# Altium PCB ch32-mainboard-v4.PcbDoc (part 2 of 2)
Units mil, origin at the board's own origin, x right, y up, seen from the top; angles counter-clockwise.
Board outline 5137.01 x 3091.1 mil, 2 copper layers (Top Layer, Bottom Layer); 87 components, 107 nets, 428 pads, 247 vias.
Unrouted connection lines stored in the file: 108.
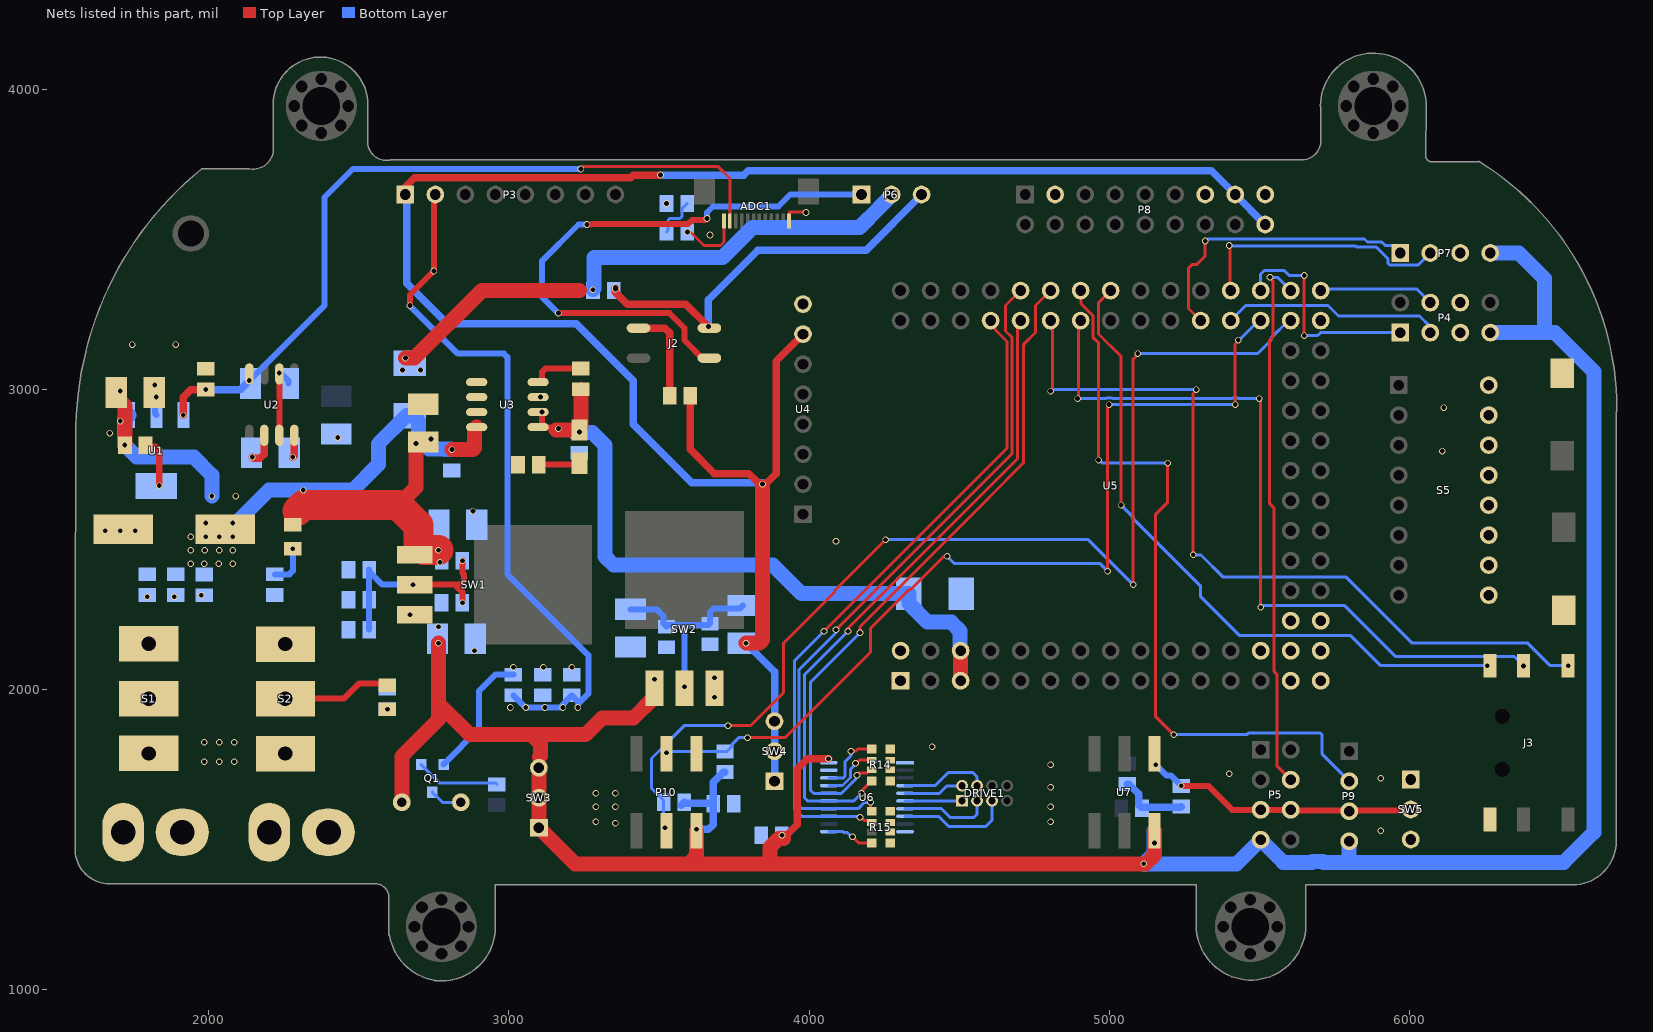
[diagram p2: the nets of this part, all layers, seen from the top]

## Via types
v1: diameter 22, hole 16, Top Layer to Bottom Layer, 247 vias

## Nets (pads, with @x,y where several pads share a name; then routed paths per layer and width w, separated by ;. In a path a pad name is that pad's centre, name@x,y a point inside that pad or via, vN(x,y) a via of type N, cw(c..) or ccw(c..) an arc to the next point about the centre after c; other vN are vias at no path point) (continued)
D8: J3.4 U5.65 | length 2237
  Top Layer w10: U5.65@5005,3330 4964.47,3289.47 4964.47,3185.53 5040,3110 v1(5040,2615) ; v1(6260,2080) 6268.15,2080 J3.4@6268.66,2079.49
  Bottom Layer w10: v1(5040,2615) 5080,2575 5080,2570 5305,2345 5305,2310 5435,2180 5805,2180 5905,2080 v1(6260,2080)
D9: J3.5 U5.68 | length 2530.5
  Top Layer w10: v1(4895,2970) 4897.3,2972.3 4897.3,3222.3 U5.68@4905,3230 ; v1(5500,2970) 5500,2966.75 5505,2961.75 v1(5505,2275)
  Bottom Layer w10: v1(4895,2970) 4988.89,2970 4990.89,2972 5009.11,2972 5011.11,2970 5408.89,2970 5410.89,2972 5429.11,2972 5431.11,2970 v1(5500,2970) ; v1(5505,2275) 5510,2280 5785,2280 5955,2110 6350.35,2110 v1(6380.87,2079.49)
D10: P9.2 U5.67 | length 2461.3
  Top Layer w10: U5.67@4905,3330 4906.84,3328.16 4906.84,3285.47 4945.53,3246.79 4945.53,3174.47 4965,3155 v1(4965,2765) ; v1(5195,2755) 5195,2625 5155,2585 5155,1910 v1(5215,1850)
  Bottom Layer w10: v1(4965,2765) 4968.25,2765 4978.25,2755 v1(5195,2755) ; v1(5215,1850) 5458.69,1850 5463.69,1855 5704.14,1855 5710,1849.14 5710,1785 P9.2@5800,1695
D11: J3.6 U5.70 | length 2687
  Top Layer w10: v1(4805,2995) 4805,2998.25 4812,3005.25 4812,3223 U5.70@4805,3230 ; v1(5280,2450) 5280,2986.75 5290,2996.75 v1(5290,3000)
  Top Layer w20: J3.6@6528.5,2079.49 6529.49,2079.49 v1(6530,2080)
  Bottom Layer w10: v1(4805,2995) 4808.25,2995 4813.25,3000 v1(5290,3000) ; v1(5280,2450) 5281,2449 5306,2449 5380,2375 5790,2375 6010,2155 6395,2155 6470,2080 v1(6530,2080)
D12: R14.3 U5.69 U6.16 | length 2244.4
  Top Layer w10: v1(4160,1715) 4166.87,1721.87 4191.87,1721.87 4197.09,1727.09 4198.62,1727.09 4205,1733.46 4205,1735 4206.5,1733.5 R14.3@4209.37,1733.5 ; v1(4170,2190) 4170,2210 4603,2643 4603,2644.11 4714,2755.11 4714,3149 4755,3190 4755,3280 U5.69@4805,3330
  Bottom Layer w10: v1(4160,1715) 4160,1706.78 4108.22,1655 U6.16@4065.91,1655 4015,1655 4005,1665 4005,2025 v1(4170,2190)
D13: R14.4 U5.72 U6.15 | length 2155.9
  Top Layer w10: v1(4130,2195) 4130,2205 4695,2770 4695,3220 U5.72@4705,3230 ; v1(4175,1655) 4177.3,1657.3 4177.3,1665.01 4207.28,1695 R14.4@4210.47,1695 ; R14.4@4209.37,1696.1 R14.4@4210.47,1695 ; R14.4@4215,1695 R14.4@4210.47,1695
  Bottom Layer w10: v1(4130,2195) 3985,2050 3985,1640 3995.59,1629.41 U6.15@4065.91,1629.41 4149.41,1629.41 v1(4175,1655)
D14: R15.1 U5.71 U6.14 | length 2322.5
  Top Layer w10: v1(4090,2200) 4676,2786 4676,3174 4655,3195 4655,3280 U5.71@4705,3330 ; v1(4205,1625) 4205,1599.37 R15.1@4209.37,1595
  Bottom Layer w10: v1(4090,2200) 4090,2190 3967,2067 3967,1613 3976.18,1603.82 U6.14@4065.91,1603.82 4163.82,1603.82 4185,1625 v1(4205,1625)
D15: R15.2 U5.74 U6.13 | length 2220
  Top Layer w10: v1(4050,2195) 4660,2805 4660,3160 4620,3200 4620,3211.82 4605,3226.82 U5.74@4605,3230 ; v1(4170,1575) 4173.25,1575 4184.23,1564.02 4202.95,1564.02 R15.2@4209.37,1557.6
  Bottom Layer w10: v1(4050,2195) 3951,2096 3951,1604 3976.77,1578.23 U6.13@4065.91,1578.23 4163.52,1578.23 4166.75,1575 v1(4170,1575)
DGND: C20.1 C21.1 C22.1 D4.1 J3.1 L7.2 P3.2 P4.5 P4.6 P5.5 P5.6 P7.3 P8.2 P8.7 P8.16 P9.3 P10.1 R1.2 R2.2 R3.2 R14.5 R14.6 R14.7 R14.8 R15.5 R15.6 R15.7 R15.8 S3.1 S4.1 S5.9 S5.10 S5.11 S5.12 S5.13 S5.14 S5.15 S5.16 SW5.1 SW5.2 SW5.3 U4.8 U5.1 U5.2 U6.1 U6.10 U6.19 U7.1 | length 3289.6
  Top Layer w20: v1(2670,3280) 2670,3315 v1(2750,3395) 2750.38,3395.38 2750.38,3645.38 P3.2@2755,3650 ; v1(5240,1680) 5330,1680 5410,1600 P5.5@5505,1600 P5.6@5605,1600 5607.5,1597.5 5797.5,1597.5 P9.3@5800,1595 5802.96,1597.96 6002.04,1597.96 SW5.2@6005,1600.93
  Bottom Layer w20: v1(2670,3280) 2830,3120 2983.28,3120 2995,3108.28 2995,2385 3265,2115 3265,1986.72 3230,1951.72 v1(3230,1940.86) 3230,1961.1 R3.2@3210,1981.1 3168.9,1940 3056.1,1940 R1.2@3015,1981.1 ; v1(5155,1750) 5190.47,1714.53 5204.92,1714.53 C21.1@5240,1679.45
  other v1: 5905,1530 3355,1555 3290,1560 4805,1560 3290,1610 3355,1610 4805,1610 3290,1655 3355,1655 4805,1675 5905,1705 5400,1720 4805,1750 4410,1810 3005,1940.86 3056.1,1940.86 3120,1940.86 3180,1940.86 4090,2495 6110,2795 6115,2940 3525,3620
E0: U5.26
E1: U5.27
E2: U5.28
E3: U5.29
E4: U5.30
E5: U5.31
E6: U5.32
E7: U5.52
E8: P4.4 U5.51 | length 385.7
  Bottom Layer w10: U5.51@5705,3330 5710,3335 6025,3335 P4.4@6070,3290
E9: P10.4 R16.2 U5.54 | length 3654.7
  Top Layer w10: v1(3730,1880) 3805,1880 3915,1990 3915,2155 4085,2325 4085,2330 v1(4255,2500) ; v1(5080,2350) 5080,3101.75 5095,3116.75 v1(5095,3120)
  Bottom Layer w10: v1(3520,1540) 3520,1543.25 3515.55,1547.7 R16.2@3515.55,1625 3515.55,1631.1 3475,1671.65 3475,1771.11 3583.89,1880 v1(3730,1880) ; v1(4255,2500) 4930,2500 v1(5080,2350) ; v1(5095,3120) 5495,3120 5540,3165 5540,3172.73 5597.27,3230 U5.54@5605,3230
E10: P5.4 U5.53 | length 1798.5
  Top Layer w10: v1(5536,3374) 5536,3370.75 5545.53,3361.23 5545.53,3175.53 5535,3165 5535,2620 5550,2605 5550,2060 5560,2050 5560,1745 P5.4@5605,1700
  Bottom Layer w10: v1(5536,3374) 5561,3374 U5.53@5605,3330
E11: P10.3 R12.2 U5.56 | length 3110.6
  Top Layer w10: v1(3795,1840) 3920,1840 4205,2125 4205,2205 4333.85,2333.85 4338.85,2333.85 4450,2445 v1(4460,2445) ; v1(4995,2395) 4995,2941.75 5000,2946.75 v1(5000,2950) ; v1(5420,2950) 5420,3151.75 5430,3161.75 v1(5430,3165)
  Bottom Layer w10: v1(3525,1790) 3528.25,1790 3532.7,1794.45 R12.2@3720,1794.45 3726.1,1794.45 3743.94,1812.28 3743.94,1818.39 3765.55,1840 v1(3795,1840) ; v1(4460,2445) 4485,2420 4970,2420 v1(4995,2395) ; v1(5000,2950) v1(5420,2950) ; v1(5430,3165) 5433.25,3165 5498.25,3230 U5.56@5505,3230
E12: P4.1 U5.55 | length 736.2
  Top Layer w10: v1(5650,3180) v1(5650,3380)
  Bottom Layer w10: U5.55@5505,3330 5505,3385 5517,3397 5583,3397 5600,3380 v1(5650,3380) ; v1(5650,3180) 5695,3180 5704.47,3189.47 5969.47,3189.47 P4.1@5970,3190
E13: P4.3 U5.58 | length 734.2
  Bottom Layer w10: U5.58@5405,3230 5455,3280 5729.47,3280 5764.47,3245 6034.14,3245 6070,3209.14 P4.3@6070,3190
E14: P7.2 U5.57 | length 874.6
  Top Layer w10: v1(5400,3480) 5402.3,3477.7 5402.3,3332.7 U5.57@5405,3330
  Bottom Layer w10: v1(5400,3480) 5401,3479 5820,3479 5824,3475 5890,3475 5929.47,3435.53 5929.47,3420.92 5935.92,3414.47 6029.47,3414.47 P7.2@6070,3455
E15: P7.1 U5.60 | length 985.9
  Top Layer w10: U5.60@5305,3230 5264.47,3270.53 5264.47,3404.47 5277.5,3417.5 5292.5,3417.5 5320,3445 v1(5320,3495)
  Bottom Layer w10: v1(5320,3495) 5327,3502 5850.89,3502 5860.89,3492 5908,3492 5920.47,3479.53 5945.47,3479.53 P7.1@5970,3455
EN: DRIVE1.5 U6.8 | length 377
  Bottom Layer w10: U6.8@4320,1578.23 4431.77,1578.23 4465,1545 4590,1545 4610,1565 DRIVE1.5@4610,1630
GND: C1.2 C2.1 C3.2 C4.2 C6.1 C7.1 C8.2 C9.1 C10.2 C11.1 C12.1 C14.2 C15.2 C16.1 C17.1 C19.1 J2.3 L4.2 L5.2 L6.2 P6.1 Q1.2 R1.1 R2.1 R3.1 R6.1 SW1.2 SW2.2 U1.2 U1.4 U2.3 U2.6 U3.1 U3.2 | length 4224.7
  Top Layer w20: C2.1@1789.45,2815 1794.45,2810 1823.28,2810 1835,2798.28 v1(1835,2680) ; U2.3@2235,2847.64 U2.6@2235,3052.36 v1(2235,3055) ; SW1.2@2686.3,2350 2820,2350 ; v1(2845,2290) 2844.62,2290.38 2844.62,2325.38 2820,2350 ; v1(2845,2430) 2845.38,2429.62 2845.38,2389.08 2850,2384.46 2850,2361.72 2838.28,2350 2820,2350 ; v1(3165,3255) 3535,3255 3585,3205 3585,3164.49 3644.49,3105 J2.3@3668.11,3105 ; v1(3260,3550) 3260.38,3550.38 3275.38,3550.38 3277.5,3552.5 3597.5,3552.5 3610,3565 3655,3565 v1(3660,3570)
  Bottom Layer w20: v1(1825,2975) 1820.38,2970.38 1820.38,2920.17 U1.2@1825.55,2915 ; v1(2235,3055) 2239.57,3055 2265,3029.57 C10.2@2265,3020 ; L4.2@2534.45,2200 L5.2@2534.45,2300 L6.2@2534.45,2393.9 ; L6.2@2534.45,2400 L6.2@2534.45,2393.9 ; v1(2680,2350) 2578.35,2350 L6.2@2534.45,2393.9 ; Q1.2@2782.4,1751.26 2782.4,1752.24 2900,1869.84 2900,1995 2955,2050 R1.1@3015,2050 ; v1(3165,3255) 3110,3310 3110,3428.18 3231.82,3550 v1(3260,3550) ; C4.2@3405,2267.99 3492.01,2267.99 3515,2245 3515,2220 C7.1@3525,2210 3530,2215 3597.5,2215 ; v1(3585,2010) 3585,2202.5 3597.5,2215 ; v1(3660,3570) 3660,3590 3680,3610 3897.74,3610 3937.74,3650 P6.1@4175,3650 ; C15.2@3780,2280.98 3769.02,2270 3681.72,2270 3670,2258.28 C17.1@3670,2220 3665,2215 3597.5,2215
  other v1: 3015,2075 3115,2075 3210,2075 2885,2130 2880,2595 2430,2840 1820,3015 1745,3150 1890,3150
NetC5_1: C5.1 U2.2 | length 110
  Top Layer w25: v1(2145,2775) 2149.35,2770.65 2170.06,2770.65 2184.7,2785.3 2184.7,2847.34 U2.2@2185,2847.64
NetC5_2: C5.2 U2.4 | length 74.7
  Top Layer w25: v1(2280,2775) 2284.51,2779.51 2284.51,2847.15 U2.4@2285,2847.64
NetC18_2: C18.2 R6.2 | length 137.5
  Top Layer w20: R6.2@3099.45,2750 3230.24,2750 C18.2@3235,2754.76
NetD1_2: D1.2 R4.2 | length 138.7
  Bottom Layer w20: R4.2@2220,2384.45 2268.28,2384.45 2280,2396.16 v1(2280,2470)
NetD2_1: D2.1 P2.2 S2.2 S2.3 | length 362.8
  Top Layer w20: S2.2@2255,1970 2450,1970 2500,2020 2590,2020 D2.1@2595,2015
NetD2_2: D2.2 R8.2
  other v1: 2595.2,1935
NetJ1_2: J1.2 Q1.3 | length 109.6
  Bottom Layer w10: Q1.3@2745,1658.74 2745,1657.76 2757.72,1645.04 2758.7,1645.04 2778.74,1625 J1.2@2840,1625
NetJ2_1: J2.1 R10.1 | length 319.6
  Top Layer w25: J2.1@3431.89,3205 3520,3205 3535.55,3189.45 R10.1@3535.55,2980
NetL1_1: L1.1 L2.1 L3.1 S1.1 S1.2
  other v1: 1795,2310 1885,2310 1975,2315
NetL7_1: L7.1 R7.2 | length 143.5
  Bottom Layer w10: R7.2@3525,3525 3530,3530 3530,3564.14 3535.86,3570 3570,3570 3576.06,3576.06 3576.06,3602.17 L7.1@3593.9,3620
NetQ1_1: Q1.1 R9.1 | length 280.7
  Bottom Layer w10: Q1.1@2707.6,1751.26 2707.6,1750.28 2767.87,1690 2954.45,1690 R9.1@2960,1684.45
NetR5_2: R5.2 U3.8 | length 178.7
  Top Layer w20: U3.8@3097.36,3025 3106.51,3025 3110,3028.49 3110,3058.28 3121.72,3070 R5.2@3240,3070
NetR14_1: R14.1 U6.18 | length 220.2
  Top Layer w10: v1(4140,1795) 4155,1795 4162.4,1802.4 R14.1@4209.37,1802.4
  Bottom Layer w10: U6.18@4065.91,1706.18 4114.14,1706.18 4120,1712.04 4120,1760 4140,1780 v1(4140,1795)
NetR14_2: R14.2 U6.17 | length 196.3
  Top Layer w10: v1(4155,1755) 4158.25,1755 4168.25,1765 R14.2@4209.37,1765
  Bottom Layer w10: U6.17@4065.91,1680.59 4111.18,1680.59 4138,1707.41 4138,1734.75 4155,1751.75 v1(4155,1755)
NetR15_4: R15.4 U6.11 | length 159.3
  Top Layer w10: v1(4145,1510) 4166.3,1488.7 R15.4@4209.37,1488.7
  Bottom Layer w10: U6.11@4065.91,1527.05 4112.95,1527.05 4115,1525 4126.75,1525 4141.75,1510 v1(4145,1510)
PGND: C13.2 L4.1 L5.1 L6.1 P1.2 P2.1 R4.1 R8.1
  other v1: 1655,2530 1705,2530 1755,2530
PWM1: DRIVE1.4 U6.4 | length 301
  Bottom Layer w10: U6.4@4320,1680.59 4420.59,1680.59 4464.14,1724.14 4545.86,1724.14 4560,1710 4560,1685 4565,1680 DRIVE1.4@4560,1680
PWM2: DRIVE1.2 U6.5 | length 200.4
  Bottom Layer w10: U6.5@4320,1655 4435,1655 4460,1680 DRIVE1.2@4510,1680
PWM3: DRIVE1.1 U6.6 | length 190.2
  Bottom Layer w10: U6.6@4320,1629.41 4509.41,1629.41 DRIVE1.1@4510,1630
PWM4: DRIVE1.3 U6.7 | length 301.1
  Bottom Layer w10: U6.7@4320,1603.82 4441.18,1603.82 4470,1575 4550,1575 4560,1585 DRIVE1.3@4560,1630
Servo-PWM: J2.4 P6.3 R11.2 | length 1317.6
  Top Layer w25: v1(3355,3340) v1(3355,3335) 3355,3325 3395,3285 3590,3285 v1(3665,3210)
  Bottom Layer w25: v1(3665,3210) 3665,3300 3830,3465 4190,3465 P6.3@4375,3650
V-FUTUBA: D3.2 P6.2 R11.1 | length 1864.6
  Top Layer w50: v1(2655,3105) 2685,3105 2910,3330 3235,3330
  Bottom Layer w25: v1(3280,3332.78) 3280,3330.55 R11.1@3280.55,3330
  Bottom Layer w50: v1(3280,3332.78) 3284.29,3337.07 3284.29,3440 3711.76,3440 3811.76,3540 4167.9,3540 4235.53,3607.63 4235.53,3608.08 4275,3647.55 P6.2@4275,3650
  other v1: 2645,3065 2705,3065
V_check: ADC1.11 C10.1 C12.2 U1.3 U2.8 | length 2591.8
  Top Layer w10: v1(3240,3735) 3249,3744 3662.07,3744 3696,3744 3736.42,3703.58 ADC1.11@3736.42,3561.69
  Top Layer w25: v1(1915,2915) 1915,2975 1940,3000 v1(1990,3000) ; v1(2135,3030) U2.8@2135,3052.36
  Bottom Layer w20: v1(2135,3030) 2385,3280 2385,3640 2480,3735 v1(3240,3735)
  Bottom Layer w25: v1(1990,3000) 2105,3000 v1(2135,3030)
V_POWER: P1.1 S1.3 S2.1
  other v1: 1985,1760 2035,1760 2085,1760 1985,1825 2035,1825 2085,1825
VCC5.0-1: C18.1 C19.2 D4.2 R5.1 U3.5 U3.6 U3.7 U5.5 U5.6 | length 2291.7
  Top Layer w20: v1(3110,2925) 3110,2878.49 3106.51,2875 U3.5@3097.36,2875 3098.81,2873.55 3160.91,2873.55 3164.46,2870 v1(3165,2870)
  Top Layer w50: v1@3157.36,2865 C18.1@3235,2865 3235,2873.86 3240,2878.86 R5.1@3240,3001.1 ; U5.5@4505,2030 U5.6@4505,2130
  Bottom Layer w50: v1(3235,2858.9) 3237.17,2856.73 3277.81,2856.73 3320,2814.55 3320,2444.29 3349.29,2415 3880,2415 3975,2320 D4.2@4332.99,2320 4332.99,2287.01 4395,2225 4473.98,2225 4503.27,2195.71 4503.27,2131.73 U5.6@4505,2130
  other v1: 3105,2975
VCC7.2: C1.1 C2.2 C3.1 C6.2 C8.1 C9.2 C13.1 D1.1 D3.1 L1.2 L2.2 L3.2 SW1.1 U1.1 U3.3 U3.4 | length 2673.2
  Top Layer w50: C1.1@1692.01,2990 1692.01,2974.25 1720.55,2945.71 C2.2@1720.55,2815 ; 2631.42,2615 2690,2673.58 v1(2690,2820) ; v1(2810,2800) 2880,2800 2885,2805 2885,2867.36 U3.4@2892.64,2875
  Top Layer w100: 2295,2595 2315,2615 2631.42,2615 2698.21,2548.21 2698.21,2481.79 2715,2465 v1(2765,2465)
  Bottom Layer w50: U1.1@1735,2915 1720,2900 v1(1720,2815) 1760,2775 1950,2775 2010,2715 v1(2010,2645) ; v1(2080,2555) 2090,2555 2200,2665 v1(2315,2665) 2480,2665 2565,2750 2565,2819.49 2658.5,2912.99 D3.1@2670,2912.99 2681.5,2912.99 2699,2895.49 2699,2836 2690,2827.01 v1(2690,2820) 2715,2820 2733.39,2801.61 C9.2@2807.83,2801.61
  other v1: 1940,2420 1985,2420 2033.33,2420 2080,2420 2770,2425 1940,2465 1986.67,2465 2035,2465 2080,2465 1940,2510 1990,2510 2035,2510 2080,2510 1990,2555 2090,2645 2740,2835 1670,2855 1705,2895 1705,2995
VCC-3.3-all: C15.1 C17.2 P3.1 P8.17 P8.18 R10.2 SW2.3 SW4.1 SW4.2 SW4.3 U4.7 | length 6875.3
  Top Layer w25: P3.1@2655,3650 2655,3675 2685.5,3705.5 3405.5,3705.5 3415,3715 v1(3505,3715) ; R10.2@3604.45,2980 3604.45,2800.55 3685,2720 3800,2720 3832.5,2687.5 ; 3860,2690 3890,2720 3890,3095 U4.7@3980,3185
  Top Layer w50: v1(3790,2155) 3835,2155 3845,2165 v1@3845,2675
  Bottom Layer w25: P3.1@2660,3630 2660,3355 2795,3220 3225,3220 3415,3030 3415,2885 3610,2690 v1@3845,2690 ; v1(3505,3715) 3782.5,3715 3797.5,3730 5340,3730 P8.17@5420,3650 P8.18@5520,3550 ; v1(3790,2155) 3885,2060 SW4.3@3885,1895 SW4.2@3885,1795 SW4.1@3885,1695
  other v1: 3685,1975 3685,2040 3845,2685
VCC-5-all: C4.1 C7.2 C14.1 C16.2 C20.2 C21.2 C22.2 J1.1 P4.7 P5.7 P7.4 P9.4 P10.2 R12.1 R13.1 R16.1 R17.1 SW1.3 SW2.1 SW3.1 SW3.2 SW3.3 U6.20 U7.2 | length 9276.4
  Top Layer w25: 3915,1505 3960,1550 3960,1735 3995,1770 v1(4065,1770)
  Top Layer w50: J1.1@2643.15,1625 2643.15,1778.15 2765,1900 2765,1955 ; v1(2765,2155) 2765,1955 ; SW3.3@3100,1740 SW3.2@3100,1640 SW3.1@3100,1540 3220,1420 3599.29,1420 ; 3101.73,1776.02 3105,1779.29 3105,1820.71 3075.71,1850 ; v1(3485,2035) SW2.1@3485,2005 3485,1975.47 3414.53,1905 3310,1905 3255,1850 3075.71,1850 ; P10.2@3625,1530.05 3625,1445.71 3599.29,1420 ; 3915,1505 3900,1505 3870,1475 3870,1420 ; U7.2@5151,1530.05 5151,1449.29 5121.71,1420 v1(5115,1420) 3870,1420 ; 2765,1955 2870,1850 3075.71,1850 ; 3599.29,1420 3870,1420
  Bottom Layer w25: R16.1@3584.45,1625 3575,1615.55 3575,1615 3585,1625 3587.5,1622.5 3678.05,1622.5 C22.2@3680.55,1620 ; v1(3625,1535) 3665,1535 3680.55,1550.55 C22.2@3680.55,1620 ; R12.1@3720,1725.55 3713.9,1725.55 3680.55,1692.2 C22.2@3680.55,1620 ; R13.1@5060,1685.55 5066.1,1685.55 5099.11,1652.54 5099.11,1615.33 5106.67,1607.78 5237.22,1607.78 C21.2@5240,1610.55
  Bottom Layer w50: 5150,1530 5150,1455 v1(5115,1420) 5425,1420 P5.7@5495,1490 ; P5.7@5505,1500 5580,1425 5675.6,1425 5677.6,1427 5712.4,1427 5714.4,1425 5790,1425 ; P9.4@5800,1495 5800,1435 5790,1425 ; P4.7@6270,3190 6450,3190 ; P7.4@6270,3455 6365,3455 6450,3370 6450,3190 ; 5790,1425 6515,1425 6615,1525 6615,3060 6485,3190 6450,3190
  other v1: 5151,1489.67 3910,1515 2765,2210 2670,2250
VSSA: ADC1.1 ADC1.12 R7.1 | length 302.9
  Top Layer w10: v1(3595,3525) 3605,3525 3650,3480 3705,3480 3716.73,3491.73 ADC1.12@3716.73,3561.69 ; ADC1.1@3933.27,3561.69 3934.17,3562.6 3934.17,3592.28 3987.72,3592.28 v1(3990,3590)
  other v1: 3670,3515
pads on no net: ADC1.0 DRIVE1.6 DRIVE1.7 DRIVE1.8 J3.0 P3.7 P3.8 P4.2 P4.8 P5.2 P5.8 P9.1 P10.5 P10.6 SW1.0 SW2.0 U2.1 U2.7 U5.3 U5.4 U6.2 U6.3 U6.9 U7.5 U7.6 Uu1. Uu1.1 Uu2. Uu2.1 Uu3. Uu3.1 Uu4. Uu4.1

## Polygon pours and split planes (outlines as drawn)
no net on Bottom Layer "Bottom Layer-No Net 5" (solid, pour order 122): 2190,2235 2173.28,2235 ccw(c2173.28,2166.72) 2125,2215 ccw(c2161.21,2178.79) 2110,2178.79 2110,1926.21 ccw(c2161.21,1926.21) 2125,1890 ccw(c2149.14,1914.14) 2149.14,1880 2363.79,1880 ccw(c2363.79,1931.21) 2400,1895 ccw(c2363.79,1931.21) 2415,1931.21 2415,2169.64 ccw(c2329.65,2169.65) 2390,2230 ccw(c2348.07,2056.69) 2348.07,2235
VCC5.0-1 on Bottom Layer "Bottom Layer-VCC5.0-1" (solid, pour order 114): 3075,2990 3275,2990 3275,2835 3270,2840 3075,2840
no net on Bottom Layer "Bottom Layer-No Net 3" (solid, pour order 110): 2166.52,3741.6 1986.6,3741.6 1974.94,3741.6 1974.94,3730.86 1742.5,3498.42 1742.5,3480 1615,3190 2440,3190 2440,3760 2440,3741.6
VSSA on Bottom Layer "Bottom Layer-VSSA" (solid, pour order 134): 3475,3745 3475,3475 4260,3475 4260,3745
DGND on Bottom Layer "Bottom Layer-No Net 4" (solid, pour order 104): 2440,3205.44 2440,3755 3535,3755 3535,3480 4190,3480 4190,3755 6235.53,3751.61 cw(c5765.63,2956.24) 6682.95,3065.52 6660,1365 2554.14,1365 cw(c2554.14,1375) 2547.07,1367.93 cw(c2564.14,1385) 2540,1385 2540,1770 cw(c2585,1770) 2585,1815 2592.5,1815 2600,1822.5 2600,2030 3220,2030 3350,1900 3815,1900 3850,1935 3835,1950 3835,3280 3825,3290 3820,3285 3075,3285 3075,3201.14
GND on Bottom Layer "Bottom Layer-GND 2" (solid, pour order 148): 1580,2600 2505,2600 2502.5,2597.5 2502.5,2072.5 ccw(c2542.5,2072.5) 2542.5,2032.5 3242.5,2032.5 3370,1905 3820,1905 3905,1990 3905,2105 3855,2105 3835,2125 3835,2930 3840,2935 3835,2940 3835,3265 3840,3270 3835,3275 3110,3275 3100,3285 3100,3200 1590,3200 1585,3195
VCC7.2 on Bottom Layer "Bottom Layer-VCC7.2 2" (solid, pour order 88): 2615,2915 2770,2915 2770,2825 2840,2825 2840,2940 2930,2940 2930,2780 2615,2780
VCC7.2 on Bottom Layer "Bottom Layer-VCC7.2 3" (solid, pour order 84): 1750,3045 1750,2810 1955,2810 1955,2745 1655,2745 1650,2750 1650,3045
VCC7.2 on Bottom Layer "Bottom Layer-VCC7.2 4" (solid, pour order 80): 1967.54,2690 2190,2690 2155,2590 1967.54,2590
VCC-5-all on Bottom Layer "Bottom Layer-VCC-5-all 4" (solid, pour order 76): 5090.48,1635 5265,1635 5265,1595 5260,1590 5170,1590 5170,1465 5130,1465 5130,1590 5090.48,1590
VCC-5-all on Bottom Layer "Bottom Layer-VCC-5-all" (solid, pour order 66): 4025,1750 4095,1750 4095,1790 4025,1790
V-FUTUBA on Bottom Layer "Bottom Layer-V-FUTUBA" (solid, pour order 62): 3235,3365 3310,3365 3310,3290 3235,3290
VCC-5-all on Bottom Layer "Bottom Layer-VCC-5-all 1" (solid, pour order 60): 3355,2180 3355,1930 3515,1930 3515,2160 3510,2165 3452.5,2165 3452.5,2177.5 3455,2180
VCC-5-all on Bottom Layer "Bottom Layer-VCC-5-all 2" (solid, pour order 58): 3555,2120 3555,2165 3350,2165 3350,2120
VCC-3.3-all on Bottom Layer "Bottom Layer-VCC-3.3-all" (solid, pour order 54): 3640,2180 3825,2180 3825,2110 3820,2115 3720,2115 3720,1950 3710,1940 3655,1940 3650,1945 3650,2125 3640,2125
Servo-PWM on Bottom Layer "Bottom Layer-Servo-PWM" (solid, pour order 46): 3625,3245 3710,3245 3710,3190 3630,3190 3625,3195
GND on Bottom Layer "Bottom Layer-GND" (solid, pour order 42): 1785,3040 1785,2940 1800,2940 1800,2875 1845,2875 1845,2940 1855,2940 1855,3040
PGND on Bottom Layer "Bottom Layer-PGND" (solid, pour order 130): 1585,2590 2485,2590 2500,2575 2500,2035 2505,2030 2625,2030 2625,1825 2625,1820 2625,1815 2530,1815 2530,1405 2515,1390 1615,1390 1610,1395 1580,1425 1580,1680
GND on Bottom Layer "Bottom Layer-GND 1" (solid, pour order 38): 2850,2605 2850,2485 2825,2485 2825,2140 2855,2110 2920,2110 2920,2605
VCC-5-all on Bottom Layer "Bottom Layer-VCC-5-all 3" (solid, pour order 32): 2755,2320 2755,2285 2750,2280 2635,2280 2635,2220 2725,2220 2725,2120 2800,2120 2800,2320
VCC7.2 on Bottom Layer "Bottom Layer-VCC7.2" (solid, pour order 24): 2730,2605 2730,2490 2725,2485 2625,2485 2625,2415 2740,2415 2740,2395 2800,2395 2800,2605
VCC7.2 on Bottom Layer "Bottom Layer-VCC7.2 1" (solid, pour order 18): 1765,2360 2155,2360 2155,2465 2155,2590 1895,2590 1895,2450 1765,2450
V_POWER on Bottom Layer "Bottom Layer-V_POWER" (solid, pour order 10): 1630.56,1850 1915,1850 1915,1717.07 cw(c1902.93,1717.07) 1902.93,1705 1836.51,1705 ccw(c1836.51,1663.49) 1795,1663.49 1795,1620 1795,1455 cw(c1765,1455) 1765,1425 1660,1425 cw(c1660,1473.97) 1615.82,1452.83 cw(c1669.43,1478.49) 1610,1478.49 1610,1829.44 cw(c1630.56,1829.44)
V_POWER on Bottom Layer "Bottom Layer-V_POWER 1" (solid, pour order 8): 1685,1865 2350,1865 cw(c2350,1845) 2370,1845 2370,1735 cw(c2350,1735) 2350,1715 1665,1715 1655,1725 1655,1835 cw(c1685,1835)
NetL1_1 on Bottom Layer "Bottom Layer-NetL1_1" (solid, pour order 4): 1645,2314.99 1645,1910 ccw(c1664.99,1909.99) 1665,1890 1960,1890 ccw(c1959.99,1925.01) 1995,1925 1995,2215 cw(c2157.5,2215) 2000,2255 cw(c2013.75,2252.2) 2005.04,2263.2 2018.27,2274.41 ccw(c2006.23,2288.61) 2024.85,2288.5 cw(c2373.05,2299.6) 2025.01,2315.06 ccw(c2005.18,2319.77) 2006.43,2340.11 ccw(c2007.09,2322.65) 2005,2340 1670,2340 ccw(c1669.99,2315.01)
NetL1_1 on Top Layer "NETL1_1_L01_P126" (solid, pour order 126): 1690,2253.56 ccw(c1690,2217.35) 1664.39,2242.95 1655,2233.56 ccw(c1691.21,2197.35) 1640,2197.35 1640,1959.98 ccw(c1740,1959.98) 1669.29,1889.27 1670,1888.56 1923.58,1888.56 ccw(c1923.58,1988.56) 1994.29,1917.85 1995,1918.56 1995,2214.42 ccw(c1960.86,2214.42) 1985,2238.56 ccw(c1948.79,2202.35) 1948.79,2253.56
VCC7.2 on Top Layer "Top Layer-VCC7.2 5" (solid, pour order 120): 1895,2575 1895,2360 2155,2360 2155,2575
VCC5.0-1 on Top Layer "Top Layer-VCC5.0-1 1" (solid, pour order 118): 3070,2885 3070,2835 3255,2835 3260,2840 3260,2885
no net on Top Layer "Top Layer-No Net 1" (solid, pour order 106): 1940.62,3734.63 2560,3735.01 2570,3195 1584.35,3195
VSSA on Top Layer "Top Layer-VSSA" (solid, pour order 146): 3450,3755 3450,3470 4220,3470 4215,3475 4215,3755
DGND on Top Layer "Top Layer-No Net 2" (solid, pour order 96): 2565,2020 2565,1365 6585,1365 6683.68,1463.68 6683.68,3060 6670.61,3154.26 6536.32,3494.11 6208.55,3765 6030,3765 4215,3765 4215,3550 4215,3505 3585,3505 3555,3535 3555,3660 3485,3660 3450,3695 3450,3755 2565,3755 2565,3195 3100,3195 3100,3285 3105,3290 3110,3285 3760,3285 3760,2045 3780,2025
GND on Top Layer "Top Layer-GND4" (solid, pour order 150): 1580,2640.16 1580,3182.93 cw(c1592.07,3182.93) 1592.07,3195 3100,3195 3105,3200 3105,3290 3675,3290 3745,3220 3745,2620 3795,2620 3880,2535 3870,2525 3870,2025 3780,2025 3660,1905 3370,1905 3255,2020 3255,2025 2685,2025 2505,2025 2505,2479.73 ccw(c2399.4,2479.73) 2399.97,2585.32 1630.41,2589.48 cw(c1630.68,2640.16)
VCC7.2 on Top Layer "Top Layer-VCC7.2 2" (solid, pour order 92): 2665,2860 2850,2860 2855,2865 2930,2865 2930,2780 2925,2775 2665,2775
V-FUTUBA on Top Layer "Top Layer-V-FUTUBA 1" (solid, pour order 86): 2725,3135 2610,3135 2615,3130 2615,3035 2725,3035
VCC7.2 on Top Layer "Top Layer-VCC7.2 3" (solid, pour order 82): 1655,3045 1750,3045 1750,2790 1745,2785 1650,2785
VCC7.2 on Top Layer "Top Layer-VCC7.2 4" (solid, pour order 78): 1970,2685 2410,2685 2410,2520 1970,2520
VCC-3.3-all on Top Layer "Top Layer-VCC-3.3-all" (solid, pour order 74): 3795,2730 3795,2670 3885,2670 3885,2730
VCC-3.3-all on Top Layer "Top Layer-VCC-3.3-all 1" (solid, pour order 72): 3765,2065 3765,2185 3855,2185 3855,2000 3800,1945 3660,1945 3655,1950 3655,2065
VCC-5-all on Top Layer "Top Layer-VCC-5-all" (solid, pour order 68): 4035,1790 4095,1790 4095,1745 4035,1745
V-FUTUBA on Top Layer "Top Layer-V-FUTUBA" (solid, pour order 64): 3210,3365 3310,3365 3310,3290 3210,3290
VCC5.0-1 on Top Layer "Top Layer-VCC5.0-1" (solid, pour order 50): 3070,2990 3130,2990 3130,2860 3070,2860
VCC7.2 on Top Layer "Top Layer-VCC7.2" (solid, pour order 48): 2855,2865 2930,2865 2930,2940 2855,2940
Servo-PWM on Top Layer "Top Layer-Servo-PWM" (solid, pour order 44): 3625,3245 3625,3190 3710,3190 3710,3195 3710,3245
PGND on Top Layer "Top Layer-PGND" (solid, pour order 128): 1575,1462.5 1575,2515 cw(c1647.5,2515) 1647.5,2587.5 1675,2587.5 1897.5,2587.5 cw(c1897.5,2555) 1930,2555 1930,2507.5 2214.09,2507.5 2430,2507.5 cw(c2430,2442.5) 2495,2442.5 2495,2432.5 2495,2257.5 2500,2252.5 cw(c2500,2197.5) 2555,2197.5 2555,1412.5 cw(c2525,1412.5) 2525,1382.5 1655,1382.5 cw(c1655,1462.5)
VCC-5-all on Top Layer "Top Layer-VCC-5-all 1" (solid, pour order 30): 2630,2280 2630,2220 2730,2220 2730,2120 2800,2120 2795,2125 2795,2280
VCC7.2 on Top Layer "Top Layer-VCC7.2 1" (solid, pour order 26): 2625,2485 2625,2415 2745,2415 2745,2395 2800,2395 2800,2485
V_POWER on Top Layer "Top Layer-V_POWER" (solid, pour order 16): 1623.88,1441.78 1623.07,1442.59 cw(c1630.47,1450) 1620,1450 1620,1865 2365,1865 2370,1860 2370,1730 1810,1730 1795,1715 1800,1710 1800,1435 1640,1435 cw(c1640.25,1458.15)
NetD2_1 on Top Layer "Top Layer-NetD2_1" (solid, pour order 14): 2110,2180 2110,1915 2145,1880 2395,1880 2395,1635 2350,1635 ccw(c2350,1575) 2290,1575 2290,1485 ccw(c2360,1485) 2360,1415 2495,1415 ccw(c2495,1450.02) 2530.01,1450.02 2530.01,2199.99 ccw(c2495,2199.99) 2495,2235 2165,2235 ccw(c2165,2180)

## Keep-outs
Keep-Out Layer:
  lines w10: 1559.72,1465 1559.72,1705 1559.72,1900 1559.72,2208.87 1562.48,2865.34 ; 1560,1465 ccw(c1669.49,1467.74) 1669.94,1358.21 ; 1562.42,2838.16 cw(c2689.54,2855.92) 1979.23,3731.23 ; 1669.94,1358.15 2553.15,1358.15 cw(c2555,1308.15) 2605,1310 2605,1185 ; 1974.3,3725.7 1979.5,3730.9 2115.9,3730.9 2145,3730 2134.1,3730.9 ccw(c2147.71,3802.29) 2219.1,3788.69 2219.1,3950 cw(c2372.05,3950) 2525,3950 2525,3815 ccw(c2592.5,3827.5) 2605,3760 5645,3760 ccw(c5640,3830) 5710,3835 ; 2605,1215 ccw(c2781.25,1211.25) 2777.5,1035 ccw(c2776.25,1208.75) 2950,1210 ; 2755,1035 2770,1035 ; 2950,1215 2950,1350 ; 2950,1355 5295,1355 5295,1215 ; 5294.96,1215.07 ccw(c5472.52,1215.07) 5650,1220 5650,1355 6545,1355 ccw(c6543.75,1496.25) 6685,1497.5 6685,1640 6685,1663.75 6685,2965 ; 5708.83,3945 cw(c5880,3945) 6051.17,3945 ; 5710,3825 5710,3950 ; 6049.32,3781.06 ccw(c6076.7,3781.06) 6076.7,3753.69 6228.69,3753.69 ; 6049.32,3781.36 6051.17,3955 ; 6231.88,3755.06 cw(c5720,2935) 6686.7,2930.04

## Other copper
Top Layer:
  text "" at 2045,3505 h60

## Silkscreen, mask and mechanical layers (free items; w line width, h text height)
Top Overlay:
  drawing of 5824 lines, arcs and shapes, not listed
  text "WAVES" at 4315,2520 h500
Top Solder:
  text "浙江工业大学" at 2043.72,3650 h60
  text "浙工大鸿泉 WAVES" at 2043.72,3585 h60
  text "阮建明 包君泽" at 2045,3505 h60
  text "2022年7月" at 2045,3380 h60

## Dimensions
990,1130 to 1015,3930 on Mechanical 1
5470,1210 to 5880,3945 on Mechanical 1
2375,3945 to 2775,1210 on Mechanical 13
3980,2585 to 1640,2250 on Bottom Solder
1935,3620 to 1940,3490 on Mechanical 1
3980,3285 to 1940,3520 on Mechanical 1
5880,3945 to 6700,3390 on Mechanical 1
2375,3945 to 2775,1210 on Mechanical 1
2095,2250 to 3930,3335 on Mechanical 1
1940,3520 to 3980,2585 on Mechanical 1
3980,2585 to 1940,3520 on Mechanical 1
1550,2265 to 6685,2965 on Mechanical 1
2775,1210 to 5470,1210 on Mechanical 1
2375,3945 to 5880,3945 on Mechanical 1

## Text inside footprints (layer, text, board x,y; h text height)
D1: Top Overlay "+" at 2270,2600 h35 r270
D2: Top Overlay "+" at 2580,2065 h35 r270
P4: Top Overlay "8" at 6350,3270 h50; Top Overlay "7" at 6350,3170 h50; Top Overlay "1" at 5870,3170 h50; Top Overlay "2" at 5870,3270 h50
P5: Top Overlay "8" at 5585,1430 h50 r270; Top Overlay "7" at 5485,1435 h50 r270; Top Overlay "1" at 5485,1890 h50 r270; Top Overlay "2" at 5585,1900 h50 r270